# Altium PCB AICat.PcbDoc
Units mil, origin at the board's own origin, x right, y up, seen from the top; angles counter-clockwise.
Board outline 6000 x 4000 mil, 2 copper layers (Top Layer, Bottom Layer); 54 components, 55 nets, 200 pads, 180 vias.
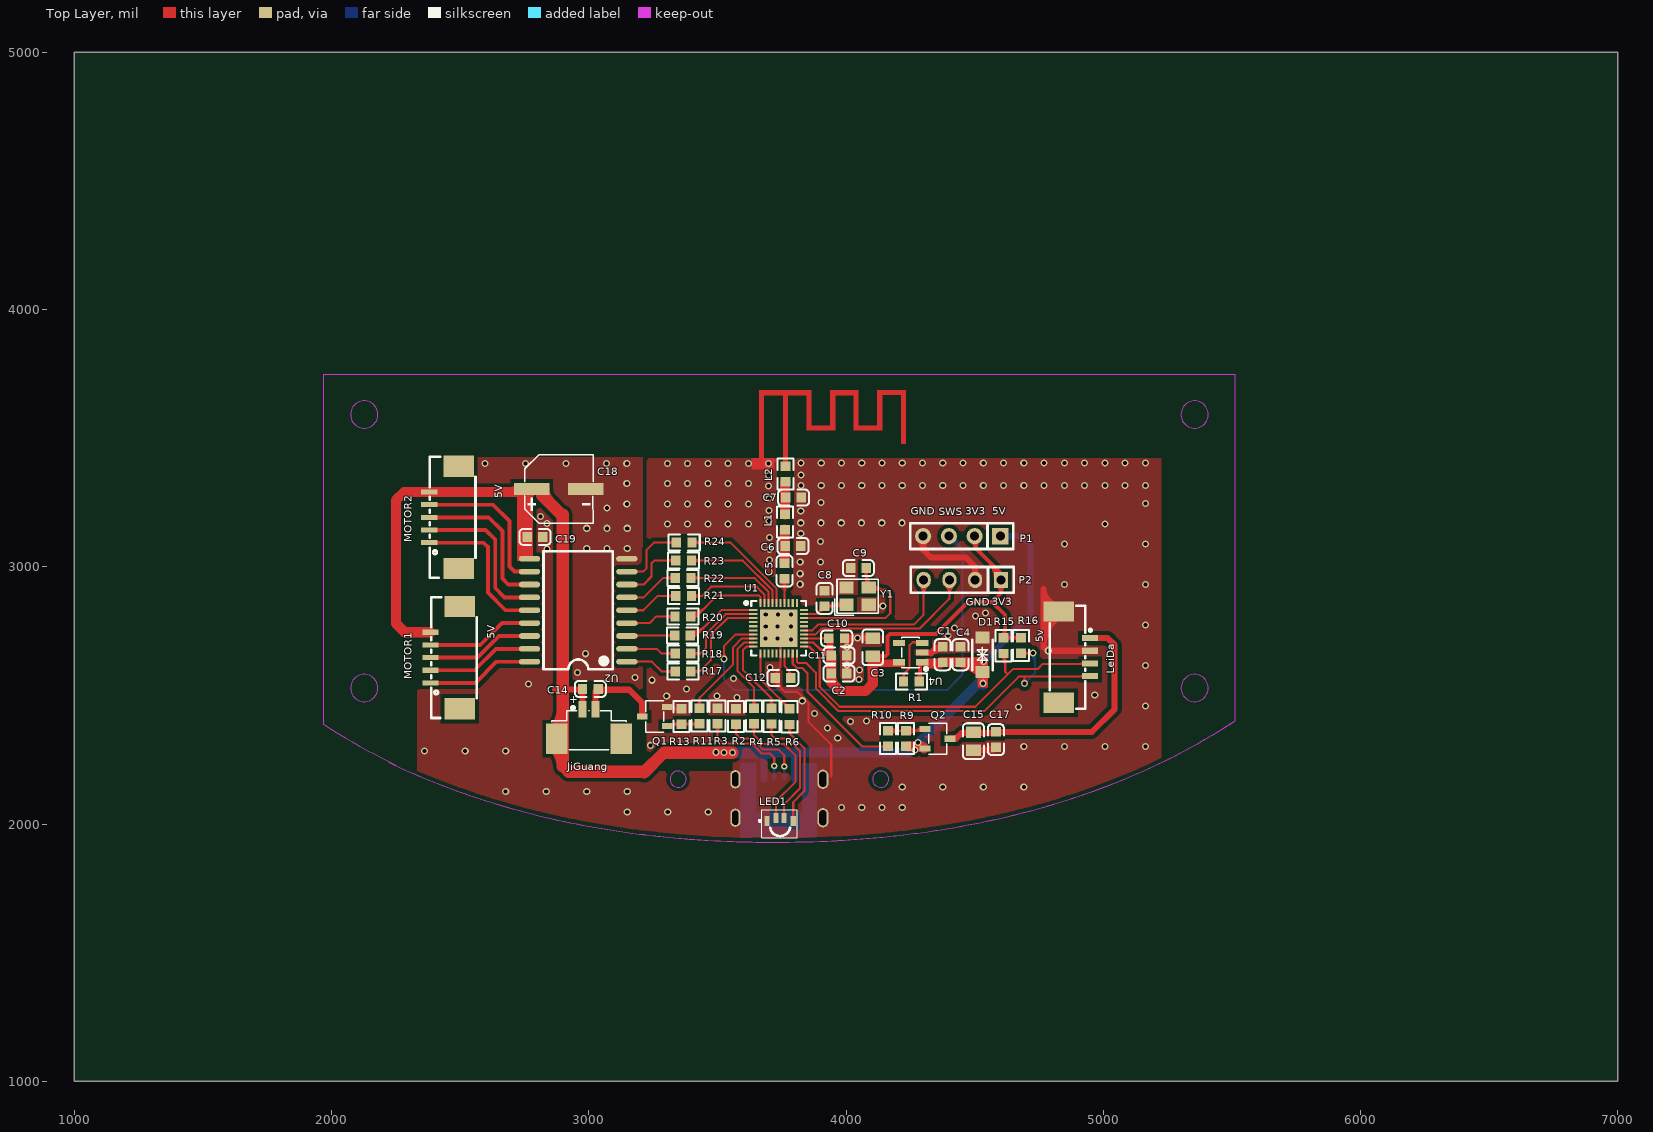
[diagram p0: Top Layer view]
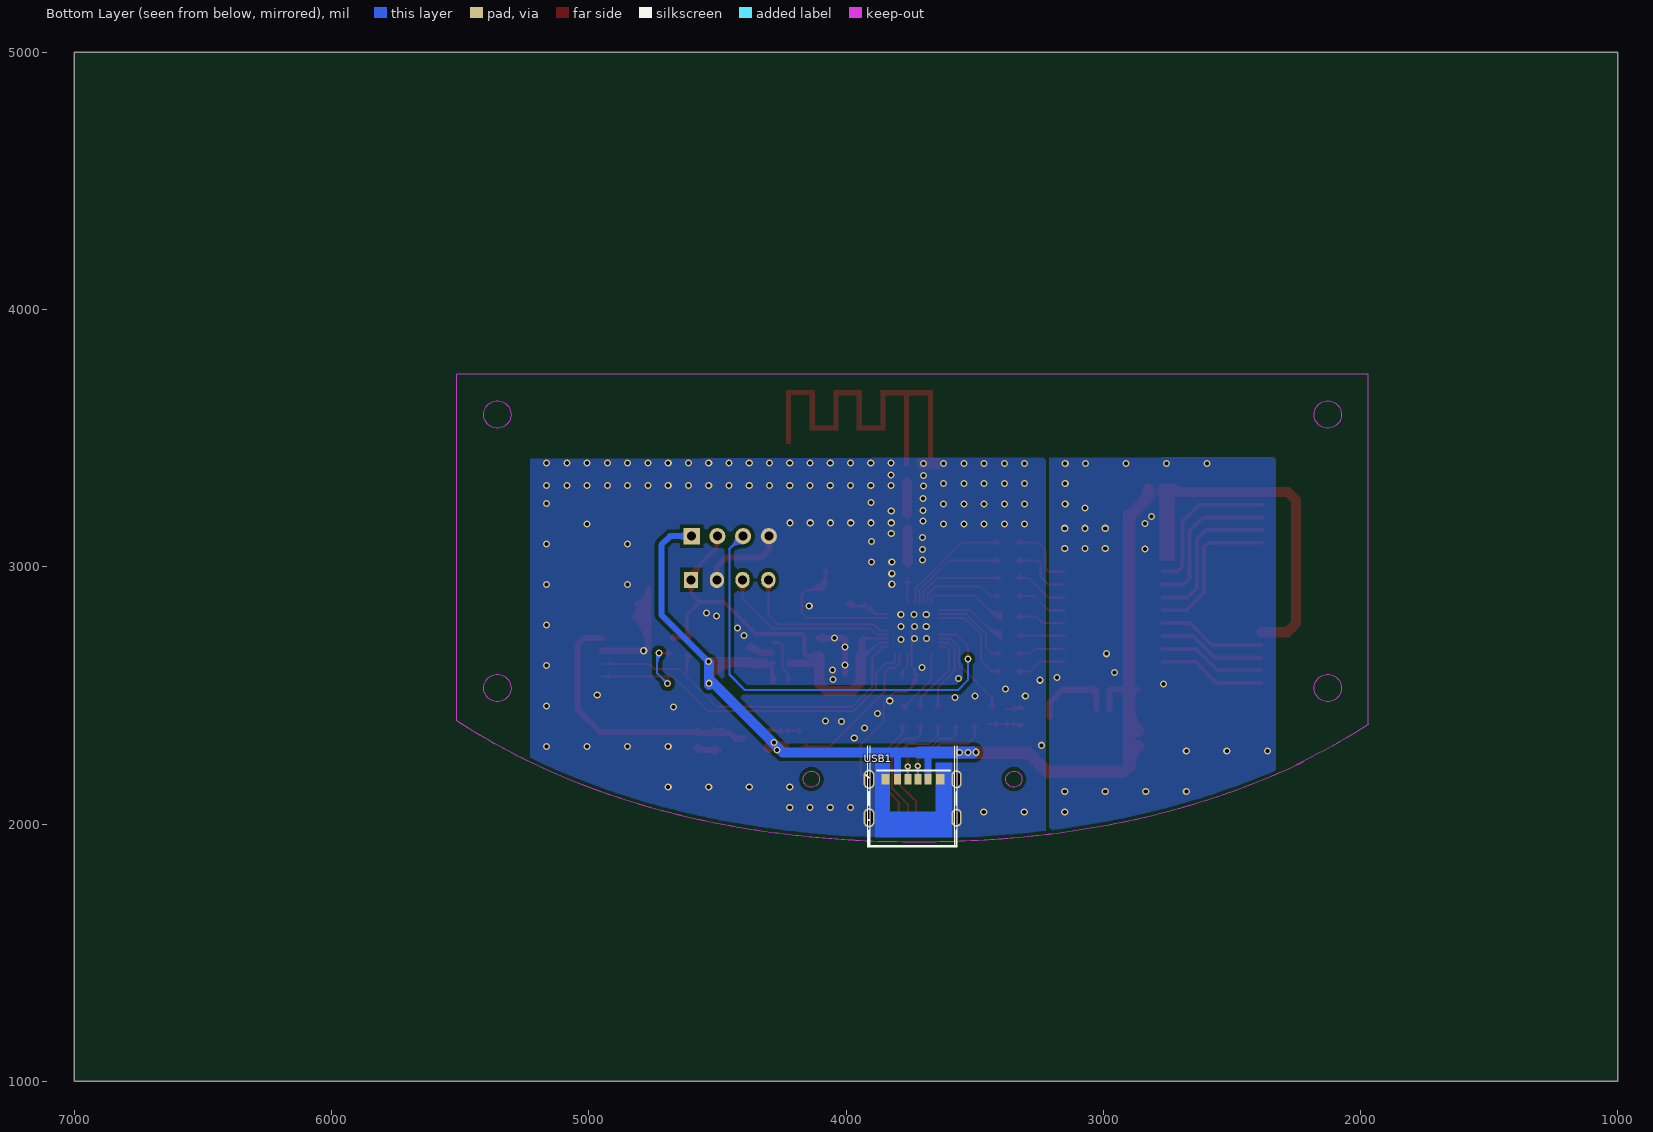
[diagram p1: Bottom Layer view, seen from below]
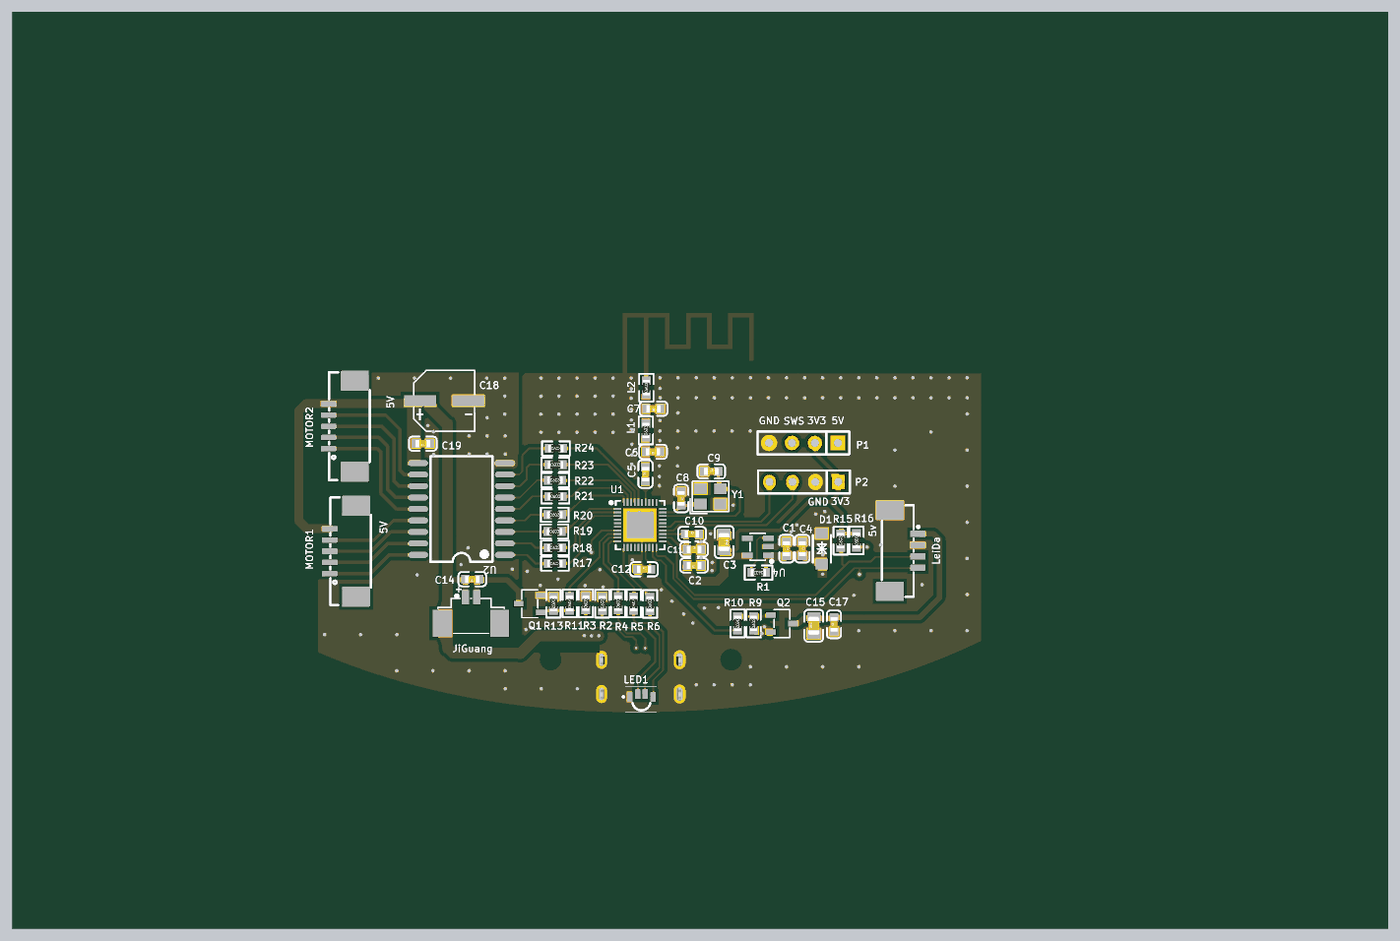
[diagram p2: 3D render of the assembled board from above, using the file's embedded part models]

## Layer stack, top to bottom
Top Solder: solder mask 0.4, Solder Resist, Dk 3.5
Top Layer: signal copper 1.4
Dielectric1: dielectric 12.6, FR-4, Dk 4.8
Bottom Layer: signal copper 1.4
Bottom Solder: solder mask 0.4, Solder Resist, Dk 3.5

## Board outline
1000,1000 7000,1000 7000,5000 1000,5000

## Design rules (kind name [scope] priority, off if disabled: settings)
Clearance [All] p1: gap=7 ignorepadtopadclearanceinfootprint=FALSE except(0: Arc-Hole Track-Hole SMDPad-Hole THPad-Hole Via-Hole Fill-Hole Poly-Hole Region-Hole Text-Hole)
ComponentClearance [All] p1: gap=0 collisioncheckmode=3 verticalgap=0 showdistances=FALSE
FabricationTestPointUsage TestPointUsage [All] p1: valid=0 allowmultiple=FALSE
FabricationTestpoint Testpoint [All] p1: side=3 testpointundercomponent=TRUE minsize=40 maxsize=100 preferedsize=60 minholesize=0 maxholesize=40 preferedholesize=32 testpointgrid=1 allowsidetop=TRUE allowsidebottom=TRUE usegrid=TRUE gridtolerance=0.01
MinimumSolderMaskSliver [All] p1: minsoldermaskwidth=2
PolygonConnect [All] p1: connectstyle=Direct reliefconductorwidth=10 reliefentries=4 polygonreliefangle="90 Angle" airgapwidth=10
RoutingVias [All] p1: holewidth=28 width=50 viastyle="Through Hole" minholewidth=28 minwidth=50 maxholewidth=28 maxwidth=50
SilkToSilkClearance [All] p1: silktosilkclearance=0
SilkToSolderMaskClearance SilkscreenOverComponentPads [IsPad] p1: minsilkscreentomaskgap=0 clearancetoexposedcopper=TRUE
SolderMaskExpansion [All] p1: expansion=4
Width [All] p1: maxlimit=200 minlimit=8 preferedwidth=10 minimp=50.000000 maximp=50.000000 favimp=50.000000
24 further rules are at their usual default settings.

## Components (designator, comment, footprint, x,y, rotation, side; value= is the part's Value field where it differs from the comment)
C1 "1uf" 0603_C 4376,2658 r270 top
C2 "1uf" 0603_C 3973,2585 r180 top
C3 "10uF" 0805_C 4104,2687 r270 top
C4 "0.1uF" 0603_C 4445,2658 r270 top
C5 "220pF" 0603_c 3761.2,2983.5 r90 top
C6 "NC" 0603_c 3794.2,3080.5 r180 top
C7 "NC" 0603_c 3796.2,3268.5 r180 top
C8 "12PF" 0603_c 3917,2877 r270 top
C9 "12PF" 0603_c 4048,2995 r0 top
C10 "1UF" 0603_c 3964,2722 r0 top
C11 "1UF" 0603_c 3973,2655 r0 top
C12 "1UF" 0603_c 3755,2568 r0 top
C14 "0.1uf/25v" 0603_C 3006,2525 r180 top
C15 "10uF" 0805_C 4495,2322 r90 top
C17 "0.1uF" 0603_C 4583,2328 r90 top
C18 "220uF/10V" "SMD 6.3*5.4 电解" 2890,3302 r0 top
C19 "100nf" 0603_C 2791,3116 r180 top
D1 "SMF5.0CA_C726939" "SOD-123 双向" 4528,2651 r270 top
JiGuang "JiGuang" CONN-SMD_2P-P1.25-LT 3001,2389 r0 top (schematic designator CN2)
L1 "0R" 0603_r 3763.2,3173.5 r90 top
L2 "0R" 0603_r 3765.2,3360.5 r90 top
LED1 "MHSC110RGBCT" LED-SMD_4P-L3.0-W1.5-L 3755,2005 r0 top
LeiDa "HC-1.25-4PLT" CONN-SMD_4P-P1.25_LT 4888,2649 r270 top (schematic designator CN4)
MOTOR1 "MOTORA" CONN-SMD_1.25-5PLT 2442,2647 r90 top (schematic designator J1)
MOTOR2 "MOTORB" CONN-SMD_1.25-5PLT 2437,3192 r90 top (schematic designator J2)
P1 "DEBUG" SIP4-2.54#1 4600,3119 r180 top
P2 "UART" SIP4-2.54#2 4602,2949 r180 top
Q1 "AO3400" SOT-23 3277,2426.31 r0 top
Q2 "SI2301 P" SOT-23 4336,2323 r180 top
R1 "10k" 0603_R 4254,2554 r180 top
R2 "5.1K" 0603_R 3573,2418.31 r90 top
R3 "5.1K" 0603_R 3501,2420 r90 top
R4 "1k" 0603_R 3642,2420 r90 top
R5 "1k" 0603_R 3710,2419 r90 top
R6 "1k" 0603_R 3781,2417 r90 top
R9 "560K" 0603_R 4233,2332 r90 top
R10 "1K" 0603_R 4163,2332 r270 top
R11 "330R" 0603_R 3431,2419.31 r90 top
R13 "10K" 0603_R 3360,2418.31 r270 top
R15 "10K" 0603_R 4612,2693 r90 top
R16 "10K" 0603_R 4681,2694 r90 top
R17 "330R" 0603_R 3366.68,2593 r0 top
R18 "330R" 0603_R 3366.68,2662 r0 top
R19 "330R" 0603_R 3364.68,2733 r0 top
R20 "330R" 0603_R 3365.68,2806 r0 top
R21 "330R" 0603_R 3369,2886 r0 top
R22 "330R" 0603_R 3367,2957 r0 top
R23 "330R" 0603_R 3369,3024 r0 top
R24 "330R" 0603_R 3371,3095 r0 top
U1 "TLSR8208C" QFN-40_L5.0-W5.0-P0.40-BL-EP3.7 3735,2759 r270 top
U2 "ULN2803A" SOIC-18_L11.6-W7.5-P1.27-LS10.3-BL 2959,2831 r90 top
U4 "SSP7615" SOT-23-5 4244,2649 r180 top
USB1 "TYPE-C 6P" TPYE-C-6 3740,2099 r90 bottom
Y1 "13.52127MHz" CRYSTAL-SMD_4P-L3.2-W2.5 4056,2884 r0 top

## Footprints (in the part's own frame and the unit in brackets; to place one, negate y for a bottom-side part, rotate by r counter-clockwise, add the part's x,y. Pads: shape width x height; smd on the part's side, far side on the other; paste and mask are expansions set on the pad)
0603_C [mm]
  rect 0.93x0.98 smd: 1(-0.77,0) 2(0.77,0)
  silkscreen extent -1.54,-0.79 1.54,0.79, body extent -0.8,-0.4 0.8,0.4, height 0.3
0603_c [mm]
  rect 0.93x0.98 smd: 1(-0.77,0) 2(0.77,0)
  silkscreen extent -1.54,-0.79 1.54,0.79, body extent -0.8,-0.4 0.8,0.4, height 0.3
0603_r [mm]
  rect 0.93x0.98 smd: 1(-0.77,0) 2(0.77,0)
  silkscreen extent -1.53,-0.79 1.54,0.79, body extent -0.85,-0.4 0.85,0.4, height 0.56
0603_R [mm]
  rect 0.93x0.98 smd: 1(-0.77,0) 2(0.77,0)
  silkscreen extent -1.53,-0.79 1.54,0.79, body extent -0.85,-0.4 0.85,0.4, height 0.56
0805_C [mm]
  rect 1.16x1.47 smd: 1(-0.89,0) 2(0.89,0)
  silkscreen extent -1.77,-1.04 1.77,1.04, body extent -1,-0.62 1,0.63, height 0.77
CONN-SMD_1.25-5PLT [mm]
  rect 0.5x1.6 smd paste+0.051: 1(-2.5,1.45) 2(-1.25,1.45) 3(0,1.45) 4(1.25,1.45) 5(2.5,1.45)
  rect 2.1x3 smd paste+0.051: 6(-5.05,-1.45) 7(5.05,-1.45)
  silkscreen extent -5.97,-3.12 5.97,1.4
CONN-SMD_2P-P1.25-LT [mm]
  rect 0.8x1.6 smd paste+0 mask+0.05: 1(-0.625,1.45) 2(0.625,1.45)
  rect 2.1x3 smd paste+0 mask+0.05: 3(-3.175,-1.45) 4(3.175,-1.45)
  silkscreen extent -3.68,-2.55 3.68,1.73
CONN-SMD_4P-P1.25_LT [mm]
  rect 0.6x1.6 smd paste+0.051: 1(-1.875,1.55) 2(-0.625,1.55) 3(0.625,1.55) 4(1.875,1.55)
  rect 2x3 smd paste+0.051: 5(-4.5,-1.55) 6(4.5,-1.55)
  silkscreen extent -5.06,-2.45 5.09,1.71
CRYSTAL-SMD_4P-L3.2-W2.5 [mm]
  rect 1.4x1.2 smd: 1(-1.383,-0.797) 2(0.817,-0.797) 3(0.817,0.903) 4(-1.383,0.903)
  silkscreen extent -2.54,-1.85 1.75,1.73
LED-SMD_4P-L3.0-W1.5-L [mm]
  rect 0.5x1 smd paste+0.051: 1(-1.588,0.179) 2(-0.688,0.479) 3(0.112,0.479) 4(1.012,0.179)
  silkscreen extent -2.39,-1.32 0.69,0.28
QFN-40_L5.0-W5.0-P0.40-BL-EP3.7 [mm]
  rect 0.2x0.8 smd paste-100 mask+0.05: 1(-1.847,-2.425) 2(-1.447,-2.425) 3(-1.047,-2.425) 4(-0.647,-2.425) 5(-0.247,-2.425) 6(0.153,-2.425) 7(0.553,-2.425) 8(0.953,-2.425) 9(1.353,-2.425) 10(1.753,-2.425) 21(1.753,2.573) 22(1.353,2.573) 23(0.953,2.573) 24(0.553,2.573) 25(0.153,2.573) 26(-0.247,2.573) 27(-0.647,2.573) 28(-1.047,2.573) 29(-1.447,2.573) 30(-1.847,2.573)
  rect 0.8x0.2 smd paste-100 mask+0.05: 11(2.452,-1.726) 12(2.452,-1.326) 13(2.452,-0.926) 14(2.452,-0.526) 15(2.452,-0.126) 16(2.452,0.274) 17(2.452,0.674) 18(2.452,1.074) 19(2.452,1.474) 20(2.452,1.874) 31(-2.546,1.874) 32(-2.546,1.474) 33(-2.546,1.074) 34(-2.546,0.674) 35(-2.546,0.274) 36(-2.546,-0.126) 37(-2.546,-0.526) 38(-2.546,-0.926) 39(-2.546,-1.326) 40(-2.546,-1.726)
  rect 3.7x3.7 smd paste-100 mask+0.05: 41(-0.047,0.074)
  silkscreen extent -2.75,-3.28 2.65,2.77
SIP4-2.54#1 [mm]
  rect 1.6x1.6 hole 0.9: 1(0,0)
  round 1.6 hole 0.9: 2(2.54,0) 3(5.08,0) 4(7.62,0)
  silkscreen extent -1.27,-1.27 8.89,1.27
SIP4-2.54#2 [mm]
  rect 1.4x1.6 hole 0.9: 1(0,0)
  oval 1.4x1.6 hole 0.9: 2(2.54,0) 3(5.08,0) 4(7.62,0)
  silkscreen extent -1.27,-1.27 8.89,1.27
"SMD 6.3*5.4 电解" [mm]
  rect 3.5x1.2 smd: 1(-2.822,0.023) 2(2.518,0.023)
  silkscreen extent -3.53,-3.35 3.22,3.4
"SOD-123 双向" [mm]
  rect 1.2x1.4 smd: 1(-1.864,0.06) 2(1.536,0.06)
  silkscreen extent -1.66,-0.94 1.34,1.06
SOIC-18_L11.6-W7.5-P1.27-LS10.3-BL [mm]
  oval 0.56x2.1 smd paste+0.051: 1(-5.08,-4.8) 2(-3.81,-4.8) 3(-2.54,-4.8) 4(-1.27,-4.8) 5(0,-4.8) 6(1.27,-4.8) 7(2.54,-4.8) 8(3.81,-4.8) 9(5.08,-4.8) 10(5.08,4.8) 11(3.81,4.8) 12(2.54,4.8) 13(1.27,4.8) 14(0,4.8) 15(-1.27,4.8) 16(-2.54,4.8) 17(-3.81,4.8) 18(-5.08,4.8)
  silkscreen extent -5.84,-3.43 5.84,3.43
SOT-23 [mm]
  rect 1.07x0.6 smd: 1(0.719,-1.166) 2(0.719,0.734) 3(-1.751,-0.216)
  silkscreen extent -1.39,-1.75 0.36,1.32
SOT-23-5 [mm]
  rect 1.2x0.6 smd paste+0 mask+0.05: 1(-1.325,0.51) 2(-1.325,-0.44) 3(-1.325,-1.39) 4(0.975,-1.39) 5(0.975,0.51)
  silkscreen extent -1.85,-1.94 0.67,1.32
TPYE-C-6 [mm]
  oval 1.9x1.1 hole 0.7 slot 1.5 at 0 deg: 7(-1.9,4.32) 7(1.9,4.32)
  oval 1.8x1 hole 0.6 slot 1.4 at 0 deg: 7(-1.9,-4.32) 7(1.9,-4.32)
  rect 1x0.7 smd: A5(1.9,0.5) A9(1.9,-1.5) B5(1.9,-0.5) B9(1.9,1.5)
  rect 1x0.8 smd: A12(1.9,-2.7) B12(1.9,2.7)
  silkscreen extent -4.7,-4.32 2.79,4.65, body extent -4.55,-4.45 2.25,4.49, height 3.41

## Part data
C1 C2 C19: library part Cap1, "无极电容"
C3 C4 C14 C15 C17: library part Cap, "Capacitor"
C5 C6 C7 C8 C9: library part CAP, "Capacitor"
C10 C11 C12: library part CAP
C18: library part RVT1A221M0605_C72494
JiGuang: library part HC-1.25-2PLT
L1 L2: library part INDUCTOR
MOTOR1 MOTOR2: library part HC-1.25-5PLT
P1 P2: library part "Header 4", "Header, 4-Pin"
Q1 Q2: library part JMTL3400A
R1 R11 R17 R18 R19 R20 R21 R22 R23 R24: library part Res2, "Resistor"
R2 R3 R4 R5 R6 R9 R10 R13 R15 R16: library part RES
U2: library part ULN2803A_C181731
U4: library part SSP7615-33M5R
USB1: library part "TYPE-C 6P LTH6.5"
Y1: library part TAXM13.56M4RLBCCT2T

## Via types
v1: diameter 27.56, hole 15.75, Top Layer to Bottom Layer, tented both sides, 178 vias
v2: diameter 23.62, hole 11.81, Top Layer to Bottom Layer, tented both sides, 2 vias

## Nets (pads, with @x,y where several pads share a name; then routed paths per layer and width w, separated by ;. In a path a pad name is that pad's centre, name@x,y a point inside that pad or via, vN(x,y) a via of type N, cw(c..) or ccw(c..) an arc to the next point about the centre after c; other vN are vias at no path point)
3V3: C2.2 C3.2 C10.1 C11.1 P1.2 P2.1 R15.2 R16.2 U1.22 U1.23 U4.5 | length 2492.4
  Top Layer w8: U1.22 3873.27,2705.73 3924,2655 ; U1.23 C10.1@3943.17,2721.48 ; 3884.68,2694.32 ccw(c3942.68,2752.31) C11.1@3942.68,2670.29 ; 3898.34,2680.66 ccw(c3942.68,2725) C11.1@3942.68,2662.29 ; 3909.62,2722.23 cw(c3909.62,2686.95) C10.1@3934.57,2711.9 ; 3910.67,2722.23 ccw(c3910.67,2756.03) C10.1@3934.57,2732.13 ; 3912,2667 ccw(c3942.68,2697.69) C11.1@3942.68,2654.29 ; C11.1@3928.87,2651.27 ccw(c3924,2649.95) 3924,2655 ; C11.1@3928.87,2658.73 cw(c3924,2660.05) 3924,2655 ; C11.1 3924,2655
  Top Layer w15: C3.2 4152.96,2651.96 4161,2660 4161,2729 4171,2739 4350,2739 4474,2863 4568,2863 ; C3.2@4120.95,2641.12 cw(c4147.12,2614.94) 4147.12,2651.96 cw(c4147.12,2688.98) C3.2@4120.95,2662.8 ; P1.2@4488.91,3097.72 cw(c4475.92,3072.83) 4504,3072.83 cw(c4543.31,3072.83) P1.2@4516.42,3101.5 ; P1.2@4504,3119 4504,3073 4602,2975 P2.1 4602,2897 ; 4552.16,3024.84 cw(c4480.25,2952.94) P2.1@4581.94,2952.94 ; 4577.76,2999.24 cw(c4531.46,2952.94) P2.1@4596.94,2952.94 ; P2.1@4587.89,2930.8 cw(c4554.45,2897) 4602,2897 ; R15.2@4605.34,2730.96 ccw(c4572.37,2763.93) 4619,2763.93 ; R15.2 4613,2724.32 R16.2 ; P2.1@4616.11,2930.8 ccw(c4649.55,2897) 4602,2897 ; R15.2@4619,2723.32 4619,2812 4568,2863 ; R15.2@4620.63,2715.67 cw(c4641.49,2694.81) 4641.49,2724.32 ; R15.2@4620.63,2730.96 ccw(c4636.66,2746.99) 4636.66,2724.32 ; R16.2@4672.37,2716.67 ccw(c4653.93,2698.23) 4653.93,2724.32 ccw(c4653.93,2750.41) R16.2@4672.37,2731.96 ; 4568,2863 4602,2897
  Top Layer w39.37: C11.1@3940,2652.32 C11.1 3942.68,2551.32 3977.5,2516.5 4075.5,2516.5 4104,2545 C3.2 C3.2@4108.03,2647.93 ; C2.2@3941.31,2584.08 ccw(c4009.22,2580.92) 3961.15,2532.85
+5V: C1.2 C4.2 C14.2 C18.1 C19.2 D1.2 JiGuang.1 JiGuang.3 MOTOR1.5 MOTOR2.5 P1.1 Q2.2 R1.1 R9.1 U2.10 U4.1 USB1.A9 USB1.B9 | length 6157.5
  Top Layer w15: R1.1@4276.67,2562.63 ccw(c4249.32,2589.97) 4288,2589.97 ; U4.1@4281.31,2625.88 cw(c4265.17,2609.74) 4288,2609.74 ; R1.1@4288,2557.69 U4.1@4288,2629.76
  Top Layer w23.62: 2869.69,2523 2970.69,2523 2971.69,2522 2976.39,2517.29 JiGuang.1 ; R1.1 R1.1@4288,2557.69
  Top Layer w39.37: MOTOR1.5 2284.57,2745.43 2250,2780 2250,3258 2282.43,3290.43 MOTOR2.5 C18.1@2775.57,3290.43 ; 2694,3290.42 ccw(c2694,3342.52) C18.1@2730.84,3305.68 ; R9.1@4241,2301.69 4296.12,2301.69 Q2.2@4303.69,2294.12 ; U4.1@4316,2624 C1.2@4365.31,2624 ; C1.2@4371,2629.69 4501.2,2629.69 D1.2@4530.37,2600.52 ; 4422.37,2629.69 cw(c4422.37,2486.45) D1.2@4523.65,2587.73 ; 4509.86,2621.03 cw(c4479.34,2590.52) D1.2@4522.5,2590.52
  Top Layer w47.24: 2819.31,3276.69 2896,3200 ; C18.1@2824.17,3302.9 ccw(c2899.19,3302.9) 2846.14,3249.86 ; JiGuang.3@2863.48,2362.16 ccw(c2778.46,2447.17) 2898.69,2447.17 ; JiGuang.3@2864.15,2301.03 cw(c2794.25,2223.43) 2898.69,2223.43 ; 2898.69,3202 2898.69,2526 2898.69,2226.31 2922,2203 3215,2203 ; 3215,2200 3292,2277 v1@3558,2277
  Bottom Layer w23.62: v1(4535,2631) 4718,2814 4718,3085 4684,3119 P1.1@4604,3119 ; P1.1@4613.92,3105.08 cw(c4647.52,3071.48) 4647.52,3119 cw(c4647.52,3166.52) P1.1@4613.92,3132.92
  Bottom Layer w27.56: 3680,2259 3680.95,2258.05 USB1.A9 ; 3799,2256 3799.05,2255.95 USB1.B9
  Bottom Layer w39.37: v1@3502,2280 v1@3504,2278 ; 3681,2278 3717,2278 4246,2278 v1@4525,2557 ; 4512.35,2544.35 cw(c4533,2523.71) v1@4533,2552.91 ; v1@4533,2541 v1(4533,2547) v1@4533,2628
  Bottom Layer w47.24: v1@3504,2278 3717,2278
  other v1: 3526,2278 3558,2278 3495,2279 4269,2288 4280,2317
CC1: R2.1 USB1.A5 | length 503.9
  Top Layer w8: R2.1@3562.88,2377.88 cw(c3538.46,2353.46) 3573,2353.46 cw(c3607.54,2353.46) R2.1@3583.12,2377.88 ; R2.1 3573,2350 3591,2332 3635.79,2332 3678.79,2289 3739,2289 3760,2268 v2(3760,2224) ; v2@3754.48,2229.52 ccw(c3741.14,2242.86) 3760,2242.86 ccw(c3778.86,2242.86) v2@3765.52,2229.52
  Bottom Layer w8: USB1.A5@3752.77,2186.62 ccw(c3735.33,2204.06) 3760,2204.06 ; v2@3754.48,2218.48 cw(c3741.14,2205.14) 3760,2205.14 cw(c3778.86,2205.14) v2@3765.52,2218.48 ; USB1.A5 3760,2174.11 v2(3760,2224) ; 3760,2202.57 ccw(c3782.55,2202.57) USB1.A5@3766.61,2186.62
CC2: R3.1 USB1.B5 | length 635.4
  Top Layer w8: 3501,2349 R3.1 3501,2336 3524,2313 3633.57,2313 3672.57,2274 3704,2274 3721,2257 v2(3721,2225) ; v2@3715.48,2230.52 ccw(c3702.14,2243.86) 3721,2243.86 ccw(c3739.86,2243.86) v2@3726.52,2230.52 ; 3501,2355.15 cw(c3535.54,2355.15) 3511.12,2379.57 ccw(c3535.54,2355.15) 3501,2355.15 ; 3501,2355.15 ccw(c3466.46,2355.15) 3490.88,2379.57 cw(c3466.46,2355.15) 3501,2355.15
  Bottom Layer w8: USB1.B5@3713.4,2186.62 ccw(c3695.07,2204.96) 3721,2204.96 ; v2@3715.48,2219.48 cw(c3702.14,2206.14) 3721,2206.14 cw(c3739.86,2206.14) v2@3726.52,2219.48 ; USB1.B5 3721,2174.48 v2(3721,2225) ; 3721,2201.67 ccw(c3742.29,2201.67) USB1.B5@3727.24,2186.62
GND: C1.1 C2.1 C3.1 C4.1 C6.1 C7.1 C8.1 C9.1 C10.2 C11.2 C12.1 C15.1 C17.1 C18.2 C19.1 D1.1 LED1.1 LeiDa.2 LeiDa.5 P1.4 P2.2 Q1.2 R2.2 R3.2 R13.1 U1.16 U1.41 U2.9 U4.2 USB1.7 USB1.A12 USB1.B12 Y1.2 Y1.4 | length 3180.8
  Top Layer w8: Q1.2 3312.88,2447.63 R13.1@3377,2447.63 ; Q1.2@3314.43,2455.06 ccw(c3332.37,2473.01) 3332.37,2447.63 ; Q1.2@3320.08,2460.72 ccw(c3351.69,2492.32) R13.1@3351.69,2447.63 ; Q1.2@3322.06,2447.63 ccw(c3322.06,2485.58) R13.1@3348.9,2458.74 ; 3326.89,2447.63 cw(c3326.89,2416.5) R13.1@3348.9,2438.51 ; 3717.83,3417.83 3723.88,3411.78 ; C12.1@3720.74,2582.74 ccw(c3716.08,2599) 3733,2599 ; C12.1@3722.95,2575.05 ccw(c3719.13,2588.39) 3733,2588.39 ; C12.1@3723,2567.21 ccw(c3749.52,2564.22) 3730.65,2545.35 ; U1.41@3730.33,2730.07 ccw(c3721.06,2752.98) U1.41@3745.78,2752.98 ; C12.1@3730.95,2566.31 ccw(c3770.64,2561.84) 3742.4,2533.6 ; U1.41@3733.33,2722.65 ccw(c3725.86,2741.11) U1.41@3745.78,2741.11 ; U1.41@3736.33,2715.23 ccw(c3730.66,2729.25) U1.41@3745.78,2729.25 ; U1.41 U1.41@3745.78,2752.98 ; C12.1@3738.9,2565.42 ccw(c3791.76,2559.47) 3754.15,2521.85 ; U1.41@3739.33,2707.82 ccw(c3735.46,2717.38) U1.41@3745.78,2717.38 ; U1.41@3742.33,2700.4 ccw(c3740.26,2705.52) U1.41@3745.78,2705.52 ; 3942.74,2185 3942.74,2308.26 3855,2396 3855,2469 3810,2514 3762,2514 3724.68,2551.32 C12.1 3733,2576.32 3733,2599 ; 3733,2599 3745.78,2611.78 3745.78,2629 U1.16 U1.41@3745.78,2752.98
  Top Layer w23.62: C2.1 v1(4003.32,2618) v1(4003.32,2688) 4003.32,2721 4005.31,2723 v1(4045,2723) 4103.04,2723 C3.1 ; v1@4003.32,2701.51 cw(c4025.82,2701.51) C10.2@4009.91,2717.42 ; 4068.97,2723 cw(c4068.97,2693.11) C3.1@4090.1,2714.25 ; 4073.6,2723 ccw(c4073.6,2746.34) C3.1@4090.1,2729.83 ; P1.4@4286.08,3105.08 cw(c4252.48,3071.48) 4300,3071.48 cw(c4347.52,3071.48) P1.4@4313.92,3105.08 ; U4.2@4290.17,2666.33 U4.2 4324.33,2666.33 4333.33,2666.33 4351,2684 ; P1.4 4300,3066 4330,3036 4465,3036 4502,2999 P2.2 ; 4330.3,2663.3 cw(c4375.02,2618.58) C1.1@4375.02,2681.82 ; 4341.15,2674.15 cw(c4363.74,2651.56) C1.1@4373.11,2682.11 ; C1.1@4363.68,2683 C1.1@4364.68,2684 ; C1.1@4370.15,2692.62 cw(c4351,2709.58) 4351,2684 ; C1.1@4371,2690.32 C1.1@4364.68,2684 ; C1.1@4376.68,2684 C1.1@4364.68,2684 ; C15.1 4572.28,2286.96 C17.1 ; C15.1@4508.9,2279.17 cw(c4527.72,2260.35) 4527.72,2286.96 cw(c4527.72,2313.57) C15.1@4508.9,2294.75 ; 4540.44,2286.96 ccw(c4540.44,2339.26) C17.1@4577.42,2302.28 ; 4768,2686.37 cw(c4920.03,2686.37) LeiDa.5@4824.59,2804.71 ; 4768,2735.76 cw(c4880.19,2735.76) LeiDa.5@4809.77,2823.1 ; 4768,2785.16 cw(c4840.36,2785.16) LeiDa.5@4794.94,2841.49 ; LeiDa.5@4768,2834.55 cw(c4800.53,2834.55) LeiDa.5@4780.11,2859.88 ; LeiDa.5@4768,2851.93 ccw(c4814.41,2851.93) LeiDa.5@4802.05,2807.19 ; 4768,2882.96 ccw(c4822.99,2882.96) LeiDa.5@4808.34,2829.96 ; LeiDa.5@4814.63,2852.73 cw(c4831.56,2914) 4768,2914 4768,2692 v1(4786.4,2673.61) 4859.4,2673.61 LeiDa.2 ; 4351,2684 C1.1@4364.68,2684
  other v1: 3149.61,2047.24 3307.09,2047.24 3464.57,2047.24 3982.48,2064.42 4061.22,2064.42 4139.96,2064.42 4218.7,2064.42 2677.17,2125.98 2834.65,2125.98 2992.13,2125.98 3149.61,2125.98 4218.7,2143.16 4376.18,2143.16 4533.66,2143.16 4691.14,2143.16 2362.2,2283.46 2519.69,2283.46 2677.17,2283.46 4691.14,2300.64 4848.62,2300.64 5006.1,2300.64 5163.58,2300.64 3240,2306 3968,2334 3928,2373 4018,2399 4079,2401 3877,2429 4670,2455 5163.58,2458.12 3830,2479 3576,2491 3498,2497 3303,2498 4967,2501 3380,2525 2766,2544 3246,2559 4051,2562 3562,2566 3180,2569 2957,2589 4052,2598 3704,2609 5163.58,2615.6 2988,2662 3786,2718 3687,2721 3734,2721 4396,2732 4421,2762 3786,2767 3688,2768 3734,2768 5163.58,2773.08 4503,2809 3787,2814 3688,2815 3735,2815 4543,2820 4143,2848 4848.62,2930.56 5163.58,2930.56 3822,2932 3822,2973 3822,3019 3900.74,3019 3702,3026 3702,3067 2838,3069 2992.13,3070.87 3070.87,3070.87 3149.61,3070.87 4848.62,3088.04 5163.58,3088.04 3900.74,3097.74 3702,3113 3824,3130 2992.13,3149.61 3070.87,3149.61 3149.61,3149.61 3305.3,3165.78 3384.04,3165.78 3462.78,3165.78 3541.52,3165.78 3620.26,3165.78 5006.1,3166.78 2837,3168 3824,3171 3902.74,3171 3981.48,3171 4060.22,3171 4138.96,3171 4217.7,3171 3700,3178 2812,3195 3824,3217 3700,3219 3070.87,3228.35 3147.82,3244.52 3305.3,3244.52 3384.04,3244.52 3462.78,3244.52 3541.52,3244.52 3620.26,3244.52 5163.58,3245.52 3902.74,3249.74 3700,3265 3699,3314 3825,3316 3903.74,3316 3982.48,3316 4061.22,3316 4139.96,3316 4218.7,3316 4297.44,3316 4376.18,3316 4454.92,3316 4533.66,3316 4612.4,3316 4691.14,3316 4769.88,3316 4848.62,3316 4927.36,3316 5006.1,3316 5084.84,3316 5163.58,3316 3147.82,3323.26 3305.3,3323.26 3384.04,3323.26 3462.78,3323.26 3541.52,3323.26 3620.26,3323.26 3699,3355 3825,3357 2596.64,3402 2754.12,3402 2911.6,3402 3069.08,3402 3147.82,3402 3305.3,3402 3384.04,3402 3462.78,3402 3541.52,3402 3620.26,3402 3699,3402 3825,3403 3903.74,3403 3982.48,3403 4061.22,3403 4139.96,3403 4218.7,3403 4297.44,3403 4376.18,3403 4454.92,3403 4533.66,3403 4612.4,3403 4691.14,3403 4769.88,3403 4848.62,3403 4927.36,3403 5006.1,3403 5084.84,3403 5163.58,3403
JIGUANG_CON: R11.2 U1.8 | length 438.3
  Top Layer w8: R11.2@3420.88,2459.75 ccw(c3396.46,2484.17) 3431,2484.17 ccw(c3465.54,2484.17) R11.2@3441.12,2459.75 ; R11.2 3431,2491 3561,2621 3561,2687 3595.48,2721.48 U1.8
LED_B: R4.2 U1.9 | length 465.1
  Top Layer w8: R4.2@3631.88,2460.43 ccw(c3607.46,2484.86) 3642,2484.86 ccw(c3676.54,2484.86) R4.2@3652.12,2460.43 ; R4.2@3632.29,2460.83 ccw(c3611.82,2483) 3642,2483 ; U1.9 3603.73,2705.73 3578,2680 3578,2595 3642,2531 R4.2 3642,2483 ; R4.2@3651.71,2460.83 cw(c3672.18,2483) 3642,2483
LED_G: R5.2 U1.10 | length 382.5
  Top Layer w8: 3599,2610 3599,2619 ; U1.10 3613.98,2689.98 3599,2675 3599,2619 ; R5.2@3700.87,2459.43 ccw(c3676.41,2483.89) 3711,2483.89 ; R5.2 3711,2450.32 3711,2488 3599,2600 3599,2619 ; 3711,2483.82 ccw(c3745.49,2483.82) R5.2@3721.1,2459.43
LED_R: R6.2 U1.11 | length 351.1
  Top Layer w8: U1.11 3667.04,2563.17 3696.11,2534.11 ; 3708.21,2522 3696.11,2534.11 ; 3753.55,2476.66 cw(c3724.21,2447.32) R6.2@3765.71,2447.32 ; 3760.51,2469.7 ccw(c3780.02,2489.21) R6.2@3780.02,2461.62 ; R6.2@3767.21,2463 cw(c3751.53,2447.32) R6.2@3773.71,2447.32 ; R6.2 3781,2449.21 3696.11,2534.11
LEIDA_CON: R10.2 U1.19 | length 645.6
  Top Layer w8: U1.19 3793.03,2621.97 3808,2607 3829,2607 3851,2585 3851,2513 4062.32,2301.68 R10.2@4169,2301.68 ; R10.2@4157.9,2291.57 ccw(c4133.48,2267.14) 4133.48,2301.68 ccw(c4133.48,2336.22) R10.2@4157.9,2311.8
MOTORA_INA: R17.2 U1.3 | length 439.3
  Top Layer w8: R17.2 3431,2593 ; R17.2@3407.23,2583 cw(c3431,2559.76) 3431,2593 ; R17.2@3407.23,2603 ccw(c3431,2626.24) 3431,2593 ; U1.3 3539.22,2800.22 3476,2737 3476,2638 3431,2593
MOTORA_INB: R18.2 U1.2 | length 392.8
  Top Layer w8: R18.2 3433,2662 3456,2685 3456,2740 3531.97,2815.97 U1.2 ; R18.2@3407.12,2651.88 cw(c3431.54,2627.46) 3431.54,2662 cw(c3431.54,2696.54) R18.2@3407.12,2672.12
MOTORA_INC: R19.2 U1.1 | length 499.7
  Top Layer w8: R19.2@3395,2724.29 ccw(c3395,2756.38) 3417.69,2733.69 ; R19.2@3395,2732.29 ccw(c3395,2783.69) 3431.35,2747.35 ; R19.2 3417,2733 ; R19.2@3395,2740.29 ccw(c3395,2811.01) 3445,2761 ; R19.2@3395,2748.29 ccw(c3395,2838.32) 3458.66,2774.66 ; R19.2@3408.08,2727.2 cw(c3417,2723.24) 3417,2733 ; R19.2@3408.08,2738.8 ccw(c3417,2742.76) 3417,2733 ; U1.1 3515.72,2831.72 3417,2733
MOTORA_IND: R20.2 U1.40 | length 535.6
  Top Layer w8: R20.2@3396,2797.29 ccw(c3396,2826.97) 3416.98,2805.98 ; R20.2@3396,2805.29 ccw(c3396,2854.28) 3430.64,2819.64 ; R20.2 3417,2806 ; R20.2@3396,2813.29 ccw(c3396,2881.59) 3444.3,2833.3 ; R20.2@3396,2821.29 ccw(c3396,2908.91) 3457.95,2846.95 ; R20.2@3409.31,2800.76 cw(c3417,2797.74) 3417,2806 ; R20.2@3409.31,2811.24 ccw(c3417,2814.26) 3417,2806 ; U1.40 3667.04,2882.96 3661,2889 3500,2889 3417,2806
MOTORA_OUTA: MOTOR1.1 U2.18 | length 419.2
  Top Layer w15: MOTOR1.1 2559.57,2548.57 2642,2631 U2.18
MOTORA_OUTB: MOTOR1.2 U2.17 | length 419.6
  Top Layer w15: MOTOR1.2 2556.15,2597.78 2639.37,2681 U2.17
MOTORA_OUTC: MOTOR1.3 U2.16 | length 419.9
  Top Layer w15: MOTOR1.3 2567.18,2646.99 2651.18,2731 U2.16
MOTORA_OUTD: MOTOR1.4 U2.15 | length 420.2
  Top Layer w15: MOTOR1.4 2578.22,2696.22 2663,2781 U2.15
MOTORB_INA: R21.2 U1.39 | length 398.8
  Top Layer w8: R21.2 3439,2886 3476,2923 3652,2923 3682.79,2892.21 U1.39 ; R21.2@3409.43,2875.88 cw(c3433.86,2851.46) 3433.86,2886 cw(c3433.86,2920.54) R21.2@3409.43,2896.12
MOTORB_INB: R22.2 U1.38 | length 436.9
  Top Layer w8: R22.2 3398.32,2956 3621,2956 ; R22.2@3407.43,2945.9 cw(c3431.82,2921.51) 3431.82,2956 ; R22.2@3407.43,2966.13 ccw(c3431.89,2990.59) 3431.89,2956 ; 3636,2956 3621,2956 ; U1.38 3698.54,2877 3698.54,2903.46 3646,2956 3621,2956
MOTORB_INC: R23.2 U1.37 | length 494.6
  Top Layer w8: R23.2 3566,3024 ; R23.2@3409.43,3013.88 cw(c3433.86,2989.46) 3433.86,3024 cw(c3433.86,3058.54) R23.2@3409.43,3034.12 ; 3594,3024 3566,3024 ; U1.37 3714.29,2908.92 3599.21,3024 3566,3024
MOTORB_IND: R24.2 U1.36 | length 512.9
  Top Layer w8: R24.2 3549.43,3095 3730.04,2914.38 U1.36 ; R24.2@3411.43,3084.88 cw(c3435.86,3060.46) 3435.86,3095 cw(c3435.86,3129.54) R24.2@3411.43,3105.12
MOTORB_OUTA: MOTOR2.1 U2.14 | length 602.6
  Top Layer w15: MOTOR2.1 2591.43,3093.57 2608.28,3076.72 2608.28,2899.72 2677,2831 U2.14
MOTORB_OUTB: MOTOR2.2 U2.13 | length 608.7
  Top Layer w15: MOTOR2.2 2599.22,3142.78 2636.28,3105.72 2636.28,2917.72 2673,2881 U2.13
MOTORB_OUTC: MOTOR2.3 U2.12 | length 608
  Top Layer w15: MOTOR2.3 2611.01,3191.99 2664.28,3138.72 2664.28,2953.72 2687,2931 U2.12
  Top Layer w20: U2.12@2769.02,2932 U2.12
MOTORB_OUTD: MOTOR2.4 U2.11 | length 601.6
  Top Layer w15: MOTOR2.4 2627.78,3241.22 2691.28,3177.72 2691.28,3000.72 2711,2981 U2.11
NetANT1_1: L2.2
NetC5_1: C5.1 U1.34 | length 151.9
  Top Layer w8: C5.1@3751.08,2943.07 cw(c3725.86,2917.84) 3761.53,2917.84 ; C5.1@3761,2956.68 3761.53,2956.15 U1.34 ; 3761.53,2919.44 cw(c3794.94,2919.44) C5.1@3771.32,2943.07
NetC5_2: C5.2 C6.2 L1.1 | length 130.2
  Top Layer w39.37: C5.2@3761,3017.31 L1.1@3761,3144.69 ; L1.1@3761.2,3141.19 L1.1
NetC7_2: C7.2 L1.2 L2.1 | length 127.2
  Top Layer w39.37: L1.2 3763.2,3328.19 L2.1
NetC10_1: 
NetC12_2: C12.2 U1.17 | length 170.3
  Top Layer w8: 3761.53,2624.47 U1.17 3761.53,2613.47 3779,2596 ; C12.2@3775.2,2579.1 ccw(c3766.02,2588.28) 3779,2588.28 ; C12.2 3779,2574.31 3779,2596 ; C12.2@3789.09,2582.78 cw(c3792.7,2596) 3779,2596
NetC14_1: C14.1 JiGuang.2 Q1.3 | length 400.6
  Top Layer w23.62: JiGuang.2 3025.61,2515.29 3032.32,2522 3157,2522 3208.06,2470.94 Q1.3 3208.06,2430.94 ; 3025.61,2482.47 cw(c3077.86,2482.47) C14.1@3040.91,2519.42 ; C14.1@3040.91,2528.61 ccw(c3056.87,2544.57) 3056.87,2522
NetC15_2: C15.2 C17.2 LeiDa.1 Q2.3 | length 1169.5
  Top Layer w23.62: Q2.3@4400.94,2331.52 4427.52,2331.52 4449,2353 4577.69,2353 C17.2 4956.31,2358.31 5044,2446 5044,2696 5017.18,2722.82 LeiDa.1 ; Q2.3@4410.19,2331.52 ccw(c4410.19,2373.36) 4439.77,2343.77 ; 4452.53,2353 ccw(c4452.53,2393.41) C15.2@4481.1,2364.83 ; C15.2@4508.9,2364.83 ccw(c4537.47,2393.41) 4537.47,2353 ; 4553.5,2353 ccw(c4553.5,2386.83) C17.2@4577.42,2362.91
NetLED1_2: LED1.2 R4.1 | length 596.5
  Top Layer w8: R4.1@3631.88,2379.57 cw(c3607.46,2355.15) 3642,2355.15 cw(c3676.54,2355.15) R4.1@3652.12,2379.57 ; R4.1 3642,2347 3678,2311 3735,2311 ; LED1.2@3723.8,2037.84 ccw(c3713.82,2047.81) 3727.93,2047.81 ccw(c3742.03,2047.81) LED1.2@3732.06,2037.84 ; 3726,2311 3735,2311 ; LED1.2 3727.93,2088 3728,2088 3803,2163 3803,2267 3759,2311 3735,2311
NetLED1_3: LED1.3 R5.1 | length 541.1
  Top Layer w8: R5.1@3699.88,2378.57 cw(c3675.46,2354.15) 3710,2354.15 cw(c3744.54,2354.15) R5.1@3720.12,2378.57 ; R5.1 3710,2347 3724,2333 3771,2333 3822,2282 3822,2140 3759.43,2077.43 LED1.3 ; LED1.3@3755.3,2037.84 ccw(c3745.32,2047.81) 3759.43,2047.81 ccw(c3773.53,2047.81) LED1.3@3763.56,2037.84
NetLED1_4: LED1.4 R6.1 | length 492.5
  Top Layer w8: R6.1@3770.88,2376.57 cw(c3746.46,2352.15) 3781,2352.15 cw(c3815.54,2352.15) R6.1@3791.12,2376.57 ; R6.1 3781,2352 3838,2295 3838,2128.14 3794.86,2085 LED1.4 ; LED1.4@3790.73,2026.03 ccw(c3780.75,2036) 3794.86,2036 ccw(c3808.96,2036) LED1.4@3798.99,2026.03
NetQ1_1: Q1.1 R11.1 R13.2 | length 363.9
  Top Layer w8: Q1.1 3312.91,2388 R11.1@3448,2388 ; Q1.1@3314.43,2380.53 cw(c3332.47,2362.48) 3332.47,2388 ; Q1.1@3320.08,2374.87 cw(c3351.78,2343.17) R13.2@3351.78,2388 ; R13.2@3348.9,2377.88 ccw(c3324.47,2353.46) 3324.48,2388 ccw(c3324.48,2422.54) R13.2@3348.9,2398.12 ; R13.2@3371.1,2377.88 cw(c3395.53,2353.46) 3395.52,2388 cw(c3395.52,2422.54) R13.2@3371.1,2398.11 ; 3393.06,2388 ccw(c3393.06,2425.95) R11.1@3419.9,2399.12 ; 3397.89,2388 cw(c3397.89,2356.87) R11.1@3419.9,2378.88
NetQ2_1: Q2.1 R9.2 R10.1 | length 350.1
  Top Layer w8: R10.1@4169,2362.31 4297.09,2362.31 Q2.1@4303.69,2368.92 ; R10.1@4180.1,2352.2 cw(c4204.52,2327.77) 4204.52,2362.31 cw(c4204.52,2396.85) R10.1@4180.1,2372.43 ; R9.2@4229.9,2352.2 ccw(c4205.48,2327.77) 4205.48,2362.31 ccw(c4205.47,2396.86) R9.2@4229.9,2372.43 ; R9.2@4252.1,2352.2 cw(c4276.52,2327.77) 4276.52,2362.31 cw(c4276.53,2396.86) R9.2@4252.1,2372.43 ; 4259.63,2362.31 ccw(c4259.63,2403.73) Q2.1@4288.92,2374.45 ; 4278.94,2362.31 ccw(c4278.94,2384.42) Q2.1@4294.57,2368.79
NetR1_2: R1.2 U4.3 | length 265.3
  Top Layer w8: R1.2@4215.4,2566.65 ccw(c4204.02,2582.68) 4223.68,2582.68 ; R1.2 4223.68,2582.68 ; R1.2@4231.96,2566.65 cw(c4243.34,2582.68) 4223.68,2582.68 ; U4.3@4272.75,2706.73 ccw(c4272.75,2715.34) U4.3@4278.84,2709.25 ; U4.3@4278.77,2698.28 ccw(c4258.73,2678.76) 4258.73,2706.73 ; U4.3@4290.17,2706.73 4258.73,2706.73 ; 4223.68,2582.68 4247,2606 4247,2695 4258.73,2706.73
NetR17_1: R17.1 U2.1 | length 285
  Top Layer w8: U2.1 3245,2631 3283,2593 R17.1 ; U2.1@3183.26,2626.03 cw(c3195.25,2614.04) 3195.25,2631 cw(c3195.25,2647.96) U2.1@3183.26,2635.97 ; R17.1@3326.25,2582.88 ccw(c3301.83,2558.46) 3301.83,2593 ccw(c3301.83,2627.54) R17.1@3326.25,2603.12
NetR18_1: R18.1 U2.2 | length 277.2
  Top Layer w8: U2.2 3264,2681 3283,2662 R18.1 ; U2.2@3183.26,2676.03 cw(c3195.25,2664.04) 3195.25,2681 cw(c3195.25,2697.96) U2.2@3183.26,2685.97 ; R18.1@3326.25,2651.88 ccw(c3301.83,2627.46) 3301.83,2662 ccw(c3301.83,2696.54) R18.1@3326.25,2672.12
NetR19_1: R19.1 U2.3 | length 268.1
  Top Layer w8: U2.3 3149.98,2733 R19.1 ; U2.3@3183.26,2726.03 cw(c3200.08,2709.22) 3200.08,2733 ; U2.3@3183.26,2735.97 ccw(c3190.42,2743.13) 3190.42,2733 ; R19.1@3324.25,2722.88 ccw(c3299.83,2698.46) 3299.83,2733 ccw(c3299.83,2767.54) R19.1@3324.25,2743.12
NetR20_1: R20.1 U2.4 | length 278.6
  Top Layer w8: U2.4 3236,2781 3261,2806 R20.1 ; U2.4@3183.26,2776.03 cw(c3195.25,2764.04) 3195.25,2781 cw(c3195.25,2797.96) U2.4@3183.26,2785.97 ; R20.1@3325.25,2795.88 ccw(c3300.83,2771.46) 3300.83,2806 ccw(c3300.83,2840.54) R20.1@3325.25,2816.12
NetR21_1: R21.1 U2.5 | length 294.4
  Top Layer w8: U2.5 3212,2831 3267,2886 R21.1 ; U2.5@3183.26,2826.03 cw(c3195.25,2814.04) 3195.25,2831 cw(c3195.25,2847.96) U2.5@3183.26,2835.97 ; R21.1@3328.57,2875.88 ccw(c3304.15,2851.46) 3304.15,2886 ccw(c3304.15,2920.54) R21.1@3328.57,2896.12
NetR22_1: R22.1 U2.6 | length 301.1
  Top Layer w8: U2.6 3213,2881 3289,2957 R22.1 ; U2.6@3183.26,2876.03 cw(c3195.25,2864.04) 3195.25,2881 cw(c3195.25,2897.96) U2.6@3183.26,2885.97 ; R22.1@3326.57,2946.88 ccw(c3302.15,2922.46) 3302.15,2957 ccw(c3302.15,2991.54) R22.1@3326.57,2967.12
NetR23_1: R23.1 U2.7 | length 340
  Top Layer w8: U2.7 3213,2931 3244,2962 3244,3013 3255,3024 R23.1 ; U2.7@3183.26,2926.03 cw(c3195.25,2914.04) 3195.25,2931 cw(c3195.25,2947.96) U2.7@3183.26,2935.97 ; R23.1@3328.57,3013.88 ccw(c3304.15,2989.46) 3304.15,3024 ccw(c3304.15,3058.54) R23.1@3328.57,3034.12
NetR24_1: R24.1 U2.8 | length 362.4
  Top Layer w8: U2.8 3211,2981 3225,2995 3225,3066 3254,3095 R24.1 ; U2.8@3183.26,2976.03 cw(c3195.25,2964.04) 3195.25,2981 cw(c3195.25,2997.96) U2.8@3183.26,2985.97 ; R24.1@3330.57,3084.88 ccw(c3306.15,3060.46) 3306.15,3095 ccw(c3306.15,3129.54) R24.1@3330.57,3105.12
RX_DEBUG: P2.3 U1.24 | length 845.1
  Top Layer w8: U1.24 3882.23,2737.23 3905,2760 4287,2760 4402,2875 P2.3 ; P2.3@4385.34,2928.4 cw(c4345.12,2888.19) 4402,2888.19 cw(c4458.88,2888.19) P2.3@4418.66,2928.4 ; P2.3@4391,2934.06 cw(c4364.44,2907.5) 4402,2907.5 cw(c4439.56,2907.5) P2.3@4413,2934.06
RX_LEIDA: LeiDa.4 R16.1 U1.20 | length 1833
  Top Layer w8: U1.20 3808.78,2631.22 3814,2626 3845,2626 3883,2588 3883,2527 3971,2439 4537,2439 4671.16,2573.16 4695,2573.16 ; R16.1 4682.31,2665 v1(4727,2665) ; R16.1@4686.44,2659.23 cw(c4700.38,2645.29) 4700.38,2665 ; v1@4687.08,2552.92 ccw(c4670.39,2569.61) 4694,2569.61 ccw(c4717.61,2569.61) v1@4700.92,2552.92 ; R16.1@4692.1,2653.57 cw(c4719.7,2625.97) v1@4719.7,2665 ; R16.1@4692.1,2673.8 ccw(c4713.35,2695.05) v1@4713.35,2665 ; v1(4694,2546) 4694,2572.16 4695,2573.16 ; v1@4720.08,2658.08 ccw(c4703.39,2641.39) 4703.39,2665 ccw(c4703.39,2688.61) v1@4720.08,2671.92 ; 4905.02,2573.16 4895,2573.16 ; 4905.65,2573.16 ccw(c4905.65,2598.85) LeiDa.4@4923.81,2580.69 ; 4915.31,2573.16 cw(c4915.31,2561.14) LeiDa.4@4923.81,2569.64 ; LeiDa.4 4947.02,2573.16 4895,2573.16 ; 4695,2573.16 4895,2573.16
  Bottom Layer w8: v1(4694,2546) 4734,2586 v1@4734,2665 ; v1@4694,2555.78 ccw(c4694,2579.39) 4710.69,2562.69 ccw(c4727.39,2546) v1@4703.78,2546 ; v1@4720.08,2658.08 cw(c4686.49,2624.49) 4734,2624.49 ; v1@4725.74,2663.74 cw(c4705.8,2643.8) 4734,2643.8
SWS: P1.3 U1.7 | length 2073.2
  Top Layer w8: v1@3519.08,2648.92 ccw(c3502.39,2665.61) 3526,2665.61 ccw(c3549.61,2665.61) v1@3532.92,2648.92 ; v1(3526,2642) 3526,2692.46 3570.77,2737.23 U1.7
  Bottom Layer w8: v1@3519.08,2635.08 cw(c3502.39,2618.39) 3526,2618.39 cw(c3549.61,2618.39) v1@3532.92,2635.08 ; v1(3526,2642) 3526,2559 3564,2521 4393,2521 4453,2581 4453,3070 P1.3@4404,3119 ; P1.3@4400,3091.5 cw(c4400,3015.47) 4453.77,3069.23 ; P1.3@4400,3099.5 cw(c4400,3042.78) 4440.11,3082.89 ; P1.3@4400,3107.5 cw(c4400,3070.09) 4426.45,3096.55 ; P1.3@4419.5,3119 ccw(c4456.91,3119) 4430.45,3092.55 ; P1.3@4427.5,3119 ccw(c4484.22,3119) 4444.11,3078.89
TX_DEBUG: P2.4 U1.25 | length 774.3
  Top Layer w8: U1.25 3868.98,2752.98 3891,2775 4263,2775 4302,2814 P2.4 ; P2.4@4285.34,2928.4 cw(c4245.12,2888.19) 4302,2888.19 cw(c4358.88,2888.19) P2.4@4318.66,2928.4 ; P2.4@4291,2934.06 cw(c4264.44,2907.5) 4302,2907.5 cw(c4339.56,2907.5) P2.4@4313,2934.06
TX_LEIDA: LeiDa.3 R15.1 U1.21 | length 1587.8
  Top Layer w8: U1.21 3856.02,2689.98 3898,2648 3898,2533.21 3975.5,2455.71 4502.71,2455.71 4628.5,2581.5 ; 3859.97,2686.03 ccw(c3849.98,2676.05) 3848.11,2690.04 cw(c3848.12,2671.14) 3861.49,2684.51 ; R15.1@4602.87,2652.57 cw(c4563.92,2613.62) 4619,2613.62 ; R15.1@4608.52,2658.23 cw(c4583.23,2632.94) 4619,2632.94 ; 4619,2642.67 cw(c4633,2642.67) R15.1@4623.1,2652.57 ; R15.1@4619,2662.69 4619,2591 4628.5,2581.5 ; 4905.02,2622.39 4889,2622.39 ; 4905.65,2622.38 ccw(c4905.65,2648.07) LeiDa.3@4923.81,2629.91 ; 4915.31,2622.39 cw(c4915.31,2610.36) LeiDa.3@4923.81,2618.86 ; LeiDa.3 4947.02,2622.39 4889,2622.39 ; 4628.5,2581.5 4649,2602 4744.61,2602 4765,2622.39 4889,2622.39
XC1: C8.2 U1.29 Y1.1 | length 496.3
  Top Layer w8: U1.29 3886.29,2815.97 C8.2 ; 3890.9,2820.58 ccw(c3864.79,2846.69) C8.2@3901.71,2846.69 ; 3893.27,2822.96 cw(c3916.02,2800.21) C8.2@3916.02,2832.38 ; 3895.29,2824.97 C8.2 ; C8.2@3901.89,2844.4 cw(c3880.34,2840.9) 3895.78,2825.47 cw(c3912.8,2808.45) C8.2@3914.82,2832.43 ; C8.2@3928.1,2836.57 cw(c3952.52,2812.15) 3952.52,2846.69 cw(c3952.52,2881.23) C8.2@3928.1,2856.8 ; C8.2@3935.93,2846.69 ccw(c3935.93,2914.31) Y1.1@3983.74,2866.49 ; 3955.24,2846.69 ccw(c3955.24,2894.99) Y1.1@3989.4,2860.83 ; 3964.57,2846.69 cw(c3964.57,2819.56) Y1.1@3983.74,2838.74 ; Y1.1@3974.56,2846.69 ccw(c3974.56,2875.68) Y1.1@3995.06,2855.18 ; Y1.1 3995.62,2846.69 C8.2
XC2: C9.2 U1.28 Y1.3 | length 913.4
  Top Layer w8: U1.28 4153.22,2800.22 4172,2819 4172,2893 4154.45,2910.55 ; C9.2@4068.2,2983.9 cw(c4043.77,2959.48) 4078.31,2959.48 cw(c4112.85,2959.48) C9.2@4088.43,2983.9 ; Y1.3@4070.36,2933.42 ccw(c4051.17,2952.61) 4078.31,2952.61 ; Y1.3@4078.31,2942.6 ccw(c4107.29,2942.6) Y1.3@4086.8,2922.11 ; 4078.31,2961.91 ccw(c4126.6,2961.91) Y1.3@4092.46,2927.76 ; C9.2@4078.31,2981.22 ccw(c4145.91,2981.22) Y1.3@4098.11,2933.42 ; C9.2 4078.31,2929.41 Y1.3 ; Y1.3@4088.18,2910.55 4154.45,2910.55 ; Y1.3@4094.86,2921.91 ccw(c4119.6,2943.17) 4119.6,2910.55 ; Y1.3@4100.93,2927.12 ccw(c4137.03,2958.15) 4137.03,2910.55 ; Y1.3@4105.99,2905.67 cw(c4117.76,2893.9) 4117.76,2910.55 ; Y1.3@4106.99,2932.34 ccw(c4154.45,2973.12) 4154.45,2910.55
pads on no net: JiGuang.4 LeiDa.6 MOTOR1.6 MOTOR1.7 MOTOR2.6 MOTOR2.7 U1.4 U1.5 U1.6 U1.12 U1.13 U1.14 U1.15 U1.18 U1.26 U1.27 U1.30 U1.31 U1.32 U1.33 U1.35 U4.4

## Polygon pours and split planes (outlines as drawn)
GND on Top Layer "Bottom Layer-No Net" (solid, remove dead copper, pour order 0): 3225,3423 3225,2278 3565,2278 3560.24,2273.24 3560.24,1932.04 4917.43,1932.04 5223,2237.6 5225,2239.61 5225,3280 5225,3422
GND on Top Layer "Bottom Layer-No Net" (solid, remove dead copper, pour order 2): 3210,3425 2197,3425 2163,3425 2163,2691.72 2334,2519.24 2333.13,2518.36 2333.13,2192.32 2333.13,2187.27 2373,2147.06 2384.98,2134.97 2476.33,2134.97 2481.98,2134.97 2567,2049.22 2583.16,2032.92 2810.27,2032.92 2820.16,2032.92 2863,1989.71 2890.21,1962.26 3190.64,1962.26 3190.64,1960.83 3244,1907 3275.21,1938.48 3436.41,1938.48 3444.79,1938.48 3457,1926.16 3462.77,1931.98 3568.68,1931.98 3568.68,2203.86 3567,2205.56 3233,2205.56 3210,2228.76
NetC5_1 on Top Layer "Bottom Layer-No Net" (solid, pour order 4): 3742,2964 3742,2934 3742,2922 3751,2913 3758,2906 3761.53,2906 3765.53,2906 3780,2920.47 3780,2931 3780,2959
GND on Bottom Layer "Bottom Layer-No Net" (solid, remove dead copper, pour order 6): 3210,3423 3210,1960.89 3208.64,1959.53 3197.11,1948 2768,1948 2573.45,1948 2330.42,2191.03 2329,2192.45 2329,3428
GND on Bottom Layer "Bottom Layer-No Net" (solid, remove dead copper, pour order 8): 3225,3425 3223,3423 3223,1957.64 3223,1957 3232,1948 3249.1,1930.9 3597.42,1930.9 3597.42,2209.42 3598,2210 3599,2209 3873,2209 3873,1933.1 3874.2,1931.89 3875.1,1931 4056,1931 4548,1931 4628,2011 4652,2035 4829,2035 5019.5,2035 5221.27,2236.77 5227,2242.5 5227,3420

## Keep-outs
Keep-Out Layer:
  circle w1: c5355.29,2528.53 r53.15
  circle w1: c5355.29,3591.52 r53.15
  circle w1: c2126.94,2528.53 r53.15
  circle w1: c2126.94,3591.52 r53.15
  circle w1: c4134.82,2174.2 r31.5
  circle w1: c3347.41,2174.2 r31.5
  lines w1: 2008.34,2362.68 cw(c3280.11,4399.91) 1969.46,2387.48 ; 2214.1,2247.62 ccw(c3367.13,4558.58) 2239.94,2234.91 ; 2222.98,2240.16 2251.58,2226.5 2279.41,2213.61 2307.36,2201.06 2336.39,2188.42 2365.55,2176.14 2394.84,2164.2 2424.24,2152.6 2454.72,2140.98 2485.31,2129.72 2516.01,2118.83 2547.77,2107.96 2578.67,2097.78 2605.77,2089.16 ; 2234.95,2234.39 2264.01,2220.69 2293.22,2207.36 2322.58,2194.39 2352.07,2181.77 2381.7,2169.51 2411.45,2157.6 2441.33,2146.04 2471.31,2134.82 2503.18,2123.33 2535.16,2112.22 2567.25,2101.5 2595.85,2092.28 2622.74,2083.91 2649.91,2075.56 2676.17,2067.75 2702.49,2060.19 2728.86,2052.86 2754.3,2046.03 2779.79,2039.42 2805.33,2033.02 2830.9,2026.84 2855.53,2021.1 2880.19,2015.55 2904.88,2010.19 2929.61,2005.02 2954.36,2000.04 2978.15,1995.44 3001.96,1991 3025.8,1986.74 3049.65,1982.64 3073.52,1978.7 3097.41,1974.93 3121.32,1971.32 3145.23,1967.88 3169.16,1964.59 3197.09,1960.95 3211.06,1959.21 3214.13,1958.83 ccw(c3674.79,5739.87) 3260.41,1953.48 3268.75,1952.58 ccw(c3706.09,6073.47) 3634.82,1930.05 ccw(c3717.35,6438.91) 3663.65,1929.61 ccw(c3718.3,6527.26) 3721.74,1929.29 ccw(c3718.32,6623.59) 3755.13,1929.43 3755.94,1929.44 ; 2251.91,2229.14 2223.01,2243.2 2194.27,2257.62 2165.71,2272.42 2137.32,2287.58 2109.11,2303.11 2081.09,2319.02 2053.27,2335.31 cw(c3282.48,4403.62) 1969.46,2387.48 ; 2639.7,2078.66 2666.64,2070.55 2693.65,2062.7 2720.71,2055.1 2747.83,2047.75 2773.19,2041.11 2798.59,2034.69 2824.03,2028.48 2849.51,2022.48 2875.03,2016.69 2900.59,2011.11 2926.17,2005.73 2951.79,2000.55 2975.61,1995.92 2999.45,1991.46 3023.31,1987.17 3047.19,1983.05 3071.09,1979.1 3095,1975.3 3118.93,1971.68 3142.88,1968.21 3166.84,1964.9 3196.34,1961.04 3224,1957.64 3251.68,1954.44 3279.37,1951.45 3307.07,1948.66 3332.93,1946.23 3358.8,1943.97 3384.66,1941.89 3410.54,1939.96 3436.41,1938.21 3462.29,1936.62 3488.16,1935.19 3512.19,1934 3536.22,1932.95 3560.24,1932.04 3584.26,1931.26 3608.28,1930.61 3632.29,1930.09 3656.3,1929.7 3680.3,1929.44 3704.29,1929.31 3728.28,1929.3 3750.41,1929.4 3755.94,1929.44 ; 1969.46,2387.48 1969.46,3749 5512.77,3749 5512.77,2401.37 ; 3755.94,1929.44 ccw(c3720.4,6483.14) 3924.99,1933.9 ccw(c3728.55,6280.45) 3963.75,1935.82 ccw(c3731.35,6227.81) 3981.87,1936.84 4007.14,1938.39 4030.93,1939.99 4056.2,1941.84 4081.47,1943.84 4106.73,1946 4131.99,1948.31 4157.24,1950.79 4183.97,1953.59 4210.7,1956.57 4237.41,1959.74 4264.11,1963.1 4290.8,1966.64 4318.95,1970.59 4347.09,1974.75 4370.77,1978.43 4394.44,1982.26 4418.09,1986.25 4441.73,1990.4 4465.34,1994.72 4488.94,1999.19 4512.51,2003.83 4536.05,2008.63 4559.57,2013.6 4584.54,2019.07 4609.46,2024.73 4634.36,2030.58 4659.21,2036.63 4684.03,2042.88 4708.81,2049.33 4733.54,2055.98 4758.23,2062.84 4784.32,2070.32 4810.36,2078.04 4836.34,2085.99 4862.26,2094.17 4889.55,2103.08 4916.78,2112.25 4948.2,2123.22 4979.52,2134.55 5010.73,2146.25 5040.41,2157.76 5069.97,2169.62 5099.41,2181.83 5128.72,2194.38 5157.9,2207.27 5186.94,2220.52 5214.45,2233.46 5241.83,2246.73 5269.06,2260.32 5296.15,2274.23 5323.08,2288.47 5351.18,2303.78 5379.1,2319.45 5406.83,2335.49 5418.66,2342.47 5423.69,2345.47 ccw(c4184.25,4419.37) 5505.19,2396.4 ccw(c4191.18,4408.59) 5512.77,2401.37 ; 3755.94,1929.44 3779.58,1929.69 3803.23,1930.06 3826.88,1930.55 3850.54,1931.16 3874.2,1931.89 3897.87,1932.75 3921.53,1933.74 3945.2,1934.86 3968.88,1936.1 3992.55,1937.48 4016.22,1938.99 4041.71,1940.76 4067.19,1942.69 4092.68,1944.78 4118.15,1947.03 4143.63,1949.44 4169.09,1952.01 4194.55,1954.75 4221.82,1957.87 4249.08,1961.18 4276.32,1964.69 4303.55,1968.4 4330.77,1972.31 4356.16,1976.14 4379.72,1979.86 4403.26,1983.73 4426.79,1987.76 4450.3,1991.95 4473.79,1996.3 4497.26,2000.81 4520.71,2005.48 4544.13,2010.32 4569.33,2015.71 4594.49,2021.3 4619.62,2027.09 4644.71,2033.08 4669.76,2039.26 4694.78,2045.65 4719.75,2052.25 4744.68,2059.05 4769.56,2066.05 4796.16,2073.8 4822.7,2081.78 4849.19,2090.01 4875.61,2098.49 4901.97,2107.23 4930.01,2116.82 4961.46,2127.96 4992.79,2139.47 5024.01,2151.35 5053.39,2162.92 5082.64,2174.83 5111.78,2187.07 5140.78,2199.66 5169.65,2212.59 5198.38,2225.86 5226.97,2239.48 5255.4,2253.45 5283.67,2267.77 5311.77,2282.44 5339.7,2297.47 5367.46,2312.86 5395.03,2328.6 5422.42,2344.71 5449.61,2361.18 ccw(c4188.16,4413.24) 5512.77,2401.37

## Other copper
Top Layer:
  rectangle net 3V3: 3925,2670 3952.17,2721.48
  rectangle net GND: 3633.39,3379 3723,3422.8
  rectangle net 3V3: 4104,2610 4229,2640
  rectangle net +5V: 4501.2,2629.69 4512,2650
  rectangle net +5V: 4512,2531 4552,2650
  region net GND: 3681.89,3678 3662.2,3678 3662.2,3418 3681.89,3418
  rectangle net NetANT1_1: 3754.72,3390.82 3774.4,3674.9
  region: 3866.7,3666.71 3866.7,3686.4 3662.2,3686.4 3662.2,3666.71
  rectangle: 3847.01,3532 3866.7,3686.2
  region: 3957.2,3528.81 3957.2,3548.5 3847.1,3548.5 3847.1,3528.81
  rectangle: 3938.61,3528.8 3958.3,3685.5
  region: 4048.6,3666.6 4048.6,3686.28 3938.5,3686.28 3938.5,3666.6
  rectangle: 4029.82,3529.8 4049.5,3686.3
  region: 4139.9,3528.81 4139.9,3548.5 4029.8,3548.5 4029.8,3528.81
  rectangle: 4121.41,3528.8 4141.1,3686.7
  region: 4232.8,3667.01 4232.8,3686.7 4122.3,3686.7 4122.3,3667.01
  rectangle: 3938.5,3671.1 3958.23,3686.3
  rectangle: 4213.11,3477 4232.8,3686.7
  rectangle net +5V: 2721,3022 2783,3324
Bottom Layer:
  rectangle net GND: 3651.92,1947.83 3887,2049
  rectangle net GND: 3828.08,1948.26 3887.16,2237.62
  rectangle net GND: 3587.52,1947.83 3651.92,2239.04

## Silkscreen, mask and mechanical layers (free items; w line width, h text height)
Top Overlay:
  lines w1: 3672.22,1945.85 3672.22,2056.09 3810.01,2056.09 3810.01,1945.85 3672.22,1945.85
  text "5V" at 2664,3266 h30 r90
  text "GND" at 4252,3202 h30
  text "3V3" at 4463,3202 h30
  text "5V" at 4569,3202 h30
  text "SWS" at 4360,3201 h30
  text "3V3" at 4566,2850 h30
  text "GND" at 4465,2848 h30
  text "5V" at 2634,2720 h30 r90
  text "5v" at 4766,2707 h30 r90
  text "+" at 2925,2469 h30
Bottom Overlay:
  lines w1: 3566.89,2304.11 3566.89,1910.41 3915.32,1910.41 3915.32,2304.11 ; 3576.74,1910.41 3576.74,2304.11 ; 3905.48,1910.41 3905.48,2304.11
Bottom Solder:
  rectangle: 3828,2187 3863,2219
  rectangle: 3782,2191 3815,2219
  rectangle: 3664,2187 3697,2218
  rectangle: 3615,2193 3653,2217